# Altium PCB SMART_WATCH.PcbDoc (part 4 of 4)
Units mil, origin at the board's own origin, x right, y up, seen from the top; angles counter-clockwise.
Board outline 2401.57 x 2362.2 mil, 2 copper layers (Top Layer, Bottom Layer); 98 components, 64 nets, 344 pads, 272 vias.
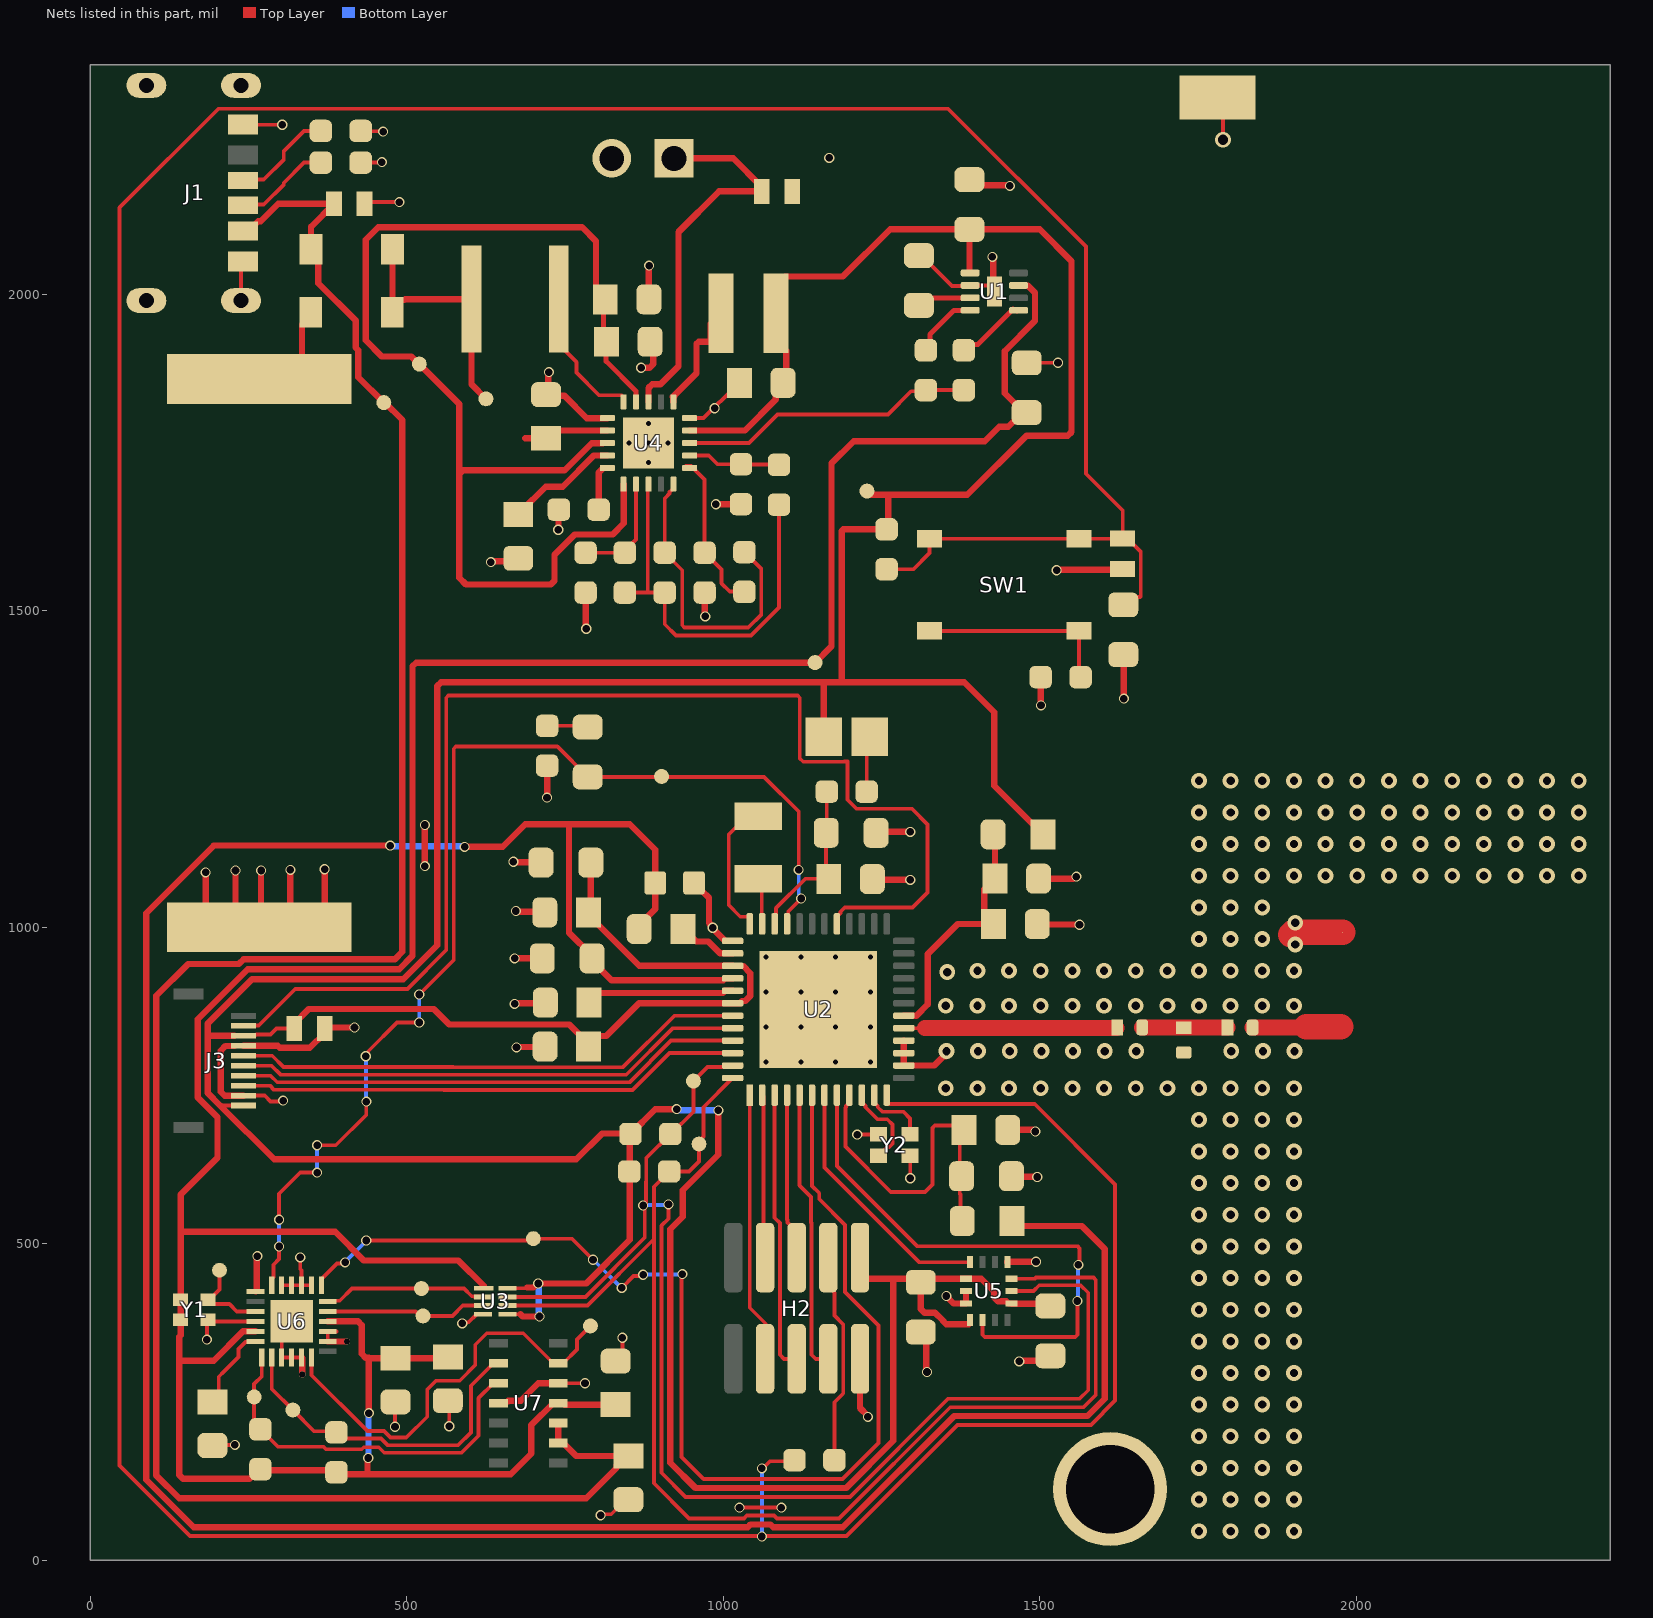
[diagram p2: the nets of this part, all layers, seen from the top]

## Part data (continued)
U6: "Ultra-Low Power Biometric Sensor Hub", Manufacturer_Name="Analog Devices Inc", Supplier Part Number 1=505-MAX32664GTGD+-ND, Copyright="Copyright (C) 2025 Ultra Librarian. All rights reserved.", Manufacturer_Part_Number=MAX32664GTGD+, RefDes=RefDes, Supplier 1=DigiKey, Type=Type
U7: "SENSOR - OXIMETER/HEART RATE I2C", Case Code (Imperial)=0603, Case Code (Metric)=1608, Dielectric=C0G, Dielectric Material=Ceramic, Manufacturer=KEMET, Manufacturer Part Number=C0603C159C5GACTU, Max Operating Temperature=125°C, Min Operating Temperature=-55°C, Package=None, Supplier Part Number=76Y2914, Supplier Part Number 1=MAX30102EFD+TCT-ND, Temperature Coefficient=30ppm/°C, Tolerance=5%, Voltage=50V, Case/Package=0603, Category="Ceramic Capacitors", Check_prices=https://www.snapeda.com/parts/MAX30102EFD+T/Maxim+Integrated/view-part/?ref=eda, China RoHS=Compliant, ComponentLink1Description=https://datasheet.octopart.com:443/C0603C159C5GACTU-KEMET-datasheet-178132257.pdf?src-supplier=IHS, ComponentLink1URL=https://datasheet.octopart.com:443/C0603C159C5GACTU-KEMET-datasheet-178132257.pdf?src-supplier=IHS, ComponentLink2Description=https://datasheet.octopart.com:443/C0603C159C5GAC7867-KEMET-datasheet-10540709.pdf?src-supplier=IHS, ComponentLink2URL=https://datasheet.octopart.com:443/C0603C159C5GAC7867-KEMET-datasheet-10540709.pdf?src-supplier=IHS, ComponentLink3Description=https://datasheet.octopart.com:443/C0603C159C5GACTU-KEMET-datasheet-137357764.pdf?src-supplier=Upverter, ComponentLink3URL=https://datasheet.octopart.com:443/C0603C159C5GACTU-KEMET-datasheet-137357764.pdf?src-supplier=Upverter, ComponentLink4Description=https://datasheet.octopart.com:443/C0603C159C5GACTU-KEMET-datasheet-68331921.pdf?src-supplier=TME, ComponentLink4URL=https://datasheet.octopart.com:443/C0603C159C5GACTU-KEMET-datasheet-68331921.pdf?src-supplier=TME, ComponentLink5Description=https://datasheet.octopart.com:443/C0603C159C5GACTU-KEMET-datasheet-137149553.pdf?src-supplier=TME, ComponentLink5URL=https://datasheet.octopart.com:443/C0603C159C5GACTU-KEMET-datasheet-137149553.pdf?src-supplier=TME, ComponentLink6Description=https://datasheet.octopart.com:443/C0603C159C5GACTU-KEMET-datasheet-149521895.pdf?src-supplier=Farnell, ComponentLink6URL=https://datasheet.octopart.com:443/C0603C159C5GACTU-KEMET-datasheet-149521895.pdf?src-supplier=Farnell, ComponentLink7Description=https://datasheet.octopart.com:443/C0603C159C5GACTU-KEMET-datasheet-100448650.pdf?src-supplier=Farnell, ComponentLink7URL=https://datasheet.octopart.com:443/C0603C159C5GACTU-KEMET-datasheet-100448650.pdf?src-supplier=Farnell, ComponentLink8Description=https://datasheet.octopart.com:443/C0603C159C5GACTU-KEMET-datasheet-176289432.pdf?src-supplier=element14+APAC, ComponentLink8URL=https://datasheet.octopart.com:443/C0603C159C5GACTU-KEMET-datasheet-176289432.pdf?src-supplier=element14+APAC, ComponentLink9Description=https://datasheet.octopart.com:443/C0603C159C5GACTU-Kemet-datasheet-66160328.pdf?src-supplier=element14+APAC, ComponentLink9URL=https://datasheet.octopart.com:443/C0603C159C5GACTU-Kemet-datasheet-66160328.pdf?src-supplier=element14+APAC, ComponentLink10Description=https://datasheet.octopart.com:443/C0603C159C5GACTU-Kemet-datasheet-62058882.pdf?src-supplier=element14+APAC, ComponentLink10URL=https://datasheet.octopart.com:443/C0603C159C5GACTU-Kemet-datasheet-62058882.pdf?src-supplier=element14+APAC, ComponentLink11Description=https://datasheet.octopart.com:443/C0603C159C5GACTU-KEMET-datasheet-81638365.pdf?src-supplier=element14+APAC, ComponentLink11URL=https://datasheet.octopart.com:443/C0603C159C5GACTU-KEMET-datasheet-81638365.pdf?src-supplier=element14+APAC, ComponentLink12Description=https://datasheet.octopart.com:443/C0603C159C5GACTU-KEMET-datasheet-157246123.pdf?src-supplier=Electro+Sonic, ComponentLink12URL=https://datasheet.octopart.com:443/C0603C159C5GACTU-KEMET-datasheet-157246123.pdf?src-supplier=Electro+Sonic, ComponentLink13Description=https://datasheet.octopart.com:443/C0603C159C5GACTU-KEMET-datasheet-41232428.pdf?src-supplier=Electro+Sonic, ComponentLink13URL=https://datasheet.octopart.com:443/C0603C159C5GACTU-KEMET-datasheet-41232428.pdf?src-supplier=Electro+Sonic, ComponentLink14Description=https://datasheet.octopart.com/C0603C159C5GACTU-KEMET-datasheet-84169754.pdf, ComponentLink14URL=https://datasheet.octopart.com/C0603C159C5GACTU-KEMET-datasheet-84169754.pdf, ComponentLink15Description=https://datasheet.octopart.com:443/C0603C159C5GACTU-Kemet-datasheet-11574563.pdf?src-supplier=Arrow+Electronics, ComponentLink15URL=https://datasheet.octopart.com:443/C0603C159C5GACTU-Kemet-datasheet-11574563.pdf?src-supplier=Arrow+Electronics, ComponentLink16Description=https://datasheet.octopart.com:443/C0603C159C5GACTU-Kemet-datasheet-5314449.pdf?src-supplier=Newark, ComponentLink16URL=https://datasheet.octopart.com:443/C0603C159C5GACTU-Kemet-datasheet-5314449.pdf?src-supplier=Newark, ComponentLink17Description=https://datasheet.octopart.com:443/C0603C159C5GACTU-Kemet-datasheet-10282724.pdf?src-supplier=Newark, ComponentLink17URL=https://datasheet.octopart.com:443/C0603C159C5GACTU-Kemet-datasheet-10282724.pdf?src-supplier=Newark, ComponentLink18Description=https://datasheet.octopart.com:443/C0603C159C5GAC7867-KEMET-datasheet-164857143.pdf?src-supplier=Burklin+Elektronik, ComponentLink18URL=https://datasheet.octopart.com:443/C0603C159C5GAC7867-KEMET-datasheet-164857143.pdf?src-supplier=Burklin+Elektronik, ComponentLink19Description=https://datasheet.octopart.com:443/C0603C159C5GAC-TU-Kemet-datasheet-8749474.pdf?src-supplier=Jameco, ComponentLink19URL=https://datasheet.octopart.com:443/C0603C159C5GAC-TU-Kemet-datasheet-8749474.pdf?src-supplier=Jameco, ComponentLink20Description=https://datasheet.octopart.com:443/C0603C159C5GACTU-Kemet-datasheet-464.pdf?src-supplier=RS+(Formerly+Allied+Electronics), ComponentLink20URL=https://datasheet.octopart.com:443/C0603C159C5GACTU-Kemet-datasheet-464.pdf?src-supplier=RS+(Formerly+Allied+Electronics), Depth=800µm, Digi-Key_Part_Number=MAX30102EFD+TTR-ND, Dissipation Factor=0.1%, Height=800µm, Lead Free="Lead Free", Lead Pitch=700µm, Length=1.6mm, Lifecycle Status=Production, Material=Ceramic, MF="Maxim Integrated Products", Mounting Technology="Surface Mount", MP=MAX30102EFD+T, Number of Terminals=2, Packaging="Cut Tape", Pins=2, Pricing="1=0.133, 10=0.048, 25=0.042, 50=0.035, 100=0.029, 250=0.026, 500=0.023 (USD)", Purchase-URL=https://pricing.snapeda.com/search/part/MAX30102EFD+T/?ref=eda, REACH SVHC=Yes, RoHS=Compliant, Schedule B="8532240020, 8532240020|8532240020|8532240020|8532240020|8532240020", SnapEDA_Link=https://www.snapeda.com/parts/MAX30102EFD+T/Maxim+Integrated/view-part/?ref=snap, Stock=56315, Supplier=Newark, Supplier 1=DigiKey, Termination=SMD/SMT, Thickness=863.6µm, Voltage Rating=50V, Voltage Rating (DC)=50V, Width=800µm
X2: "Crystal 0.032768MHz ±20ppm (Tol) 12.5pF Flexural 70000Ohm 2-Pin CSMD T/R", Case/Package=CSMD, ESR (Equivalent Series Resistance)=70kR, Frequency=32.768kHz, Frequency Tolerance=20ppm, Load Capacitance=12.5pF, Manufacturer=Abracon, Manufacturer Part Number=ABS07-32.768KHZ-H-T, Max Operating Temperature=85°C, Min Operating Temperature=-40°C, Operating Frequency="32.768 kHz", Operating Frequency-Nom=0.032768, Package Quantity=3000, Supplier Part Number=535-ABS07-32.768KHZ-H-TTR-ND, Supplier Part Number 1=535-ABS07-32.768KHZ-H-TCT-ND, Additional Feature="TAPE AND REEL", Aging="3 PPM/FIRST YEAR", Category=Crystals, ComponentLink1Description=https://datasheet.ciiva.com:443/pdfs/VipMasterIC/IC/ABRC/ABRC-S-A0006623177/ABRC-S-A0006623177-1.pdf?src-supplier=IHS+Markit, ComponentLink1URL=https://datasheet.ciiva.com:443/pdfs/VipMasterIC/IC/ABRC/ABRC-S-A0006623177/ABRC-S-A0006623177-1.pdf?src-supplier=IHS+Markit, ComponentLink2Description=https://datasheet.ciiva.com/854/abs07-854935.pdf?src-supplier=Digikey, ComponentLink2URL=https://datasheet.ciiva.com/854/abs07-854935.pdf?src-supplier=Digikey, ComponentLink3Description=https://datasheet.ciiva.com/854/abs07-854936.pdf?src-supplier=Digikey, ComponentLink3URL=https://datasheet.ciiva.com/854/abs07-854936.pdf?src-supplier=Digikey, ComponentLink4Description=https://datasheet.ciiva.com/854/abs07-854937.pdf?src-supplier=Digikey, ComponentLink4URL=https://datasheet.ciiva.com/854/abs07-854937.pdf?src-supplier=Digikey, ComponentLink5Description=https://datasheet.ciiva.com/15214/getdatasheetpartid-727011-15214954.pdf?src-supplier=Verical, ComponentLink5URL=https://datasheet.ciiva.com/15214/getdatasheetpartid-727011-15214954.pdf?src-supplier=Verical, ComponentLink6Description=https://datasheet.ciiva.com/7998/1912628-7998667.pdf?src-supplier=Element14, ComponentLink6URL=https://datasheet.ciiva.com/7998/1912628-7998667.pdf?src-supplier=Element14, ComponentLink7Description=https://datasheet.ciiva.com/1357/1883680-1357319.pdf?src-supplier=Element14, ComponentLink7URL=https://datasheet.ciiva.com/1357/1883680-1357319.pdf?src-supplier=Element14, ComponentLink8Description=https://datasheet.ciiva.com/4944/abs07-11028-4944830.pdf?src-supplier=Mouser, ComponentLink8URL=https://datasheet.ciiva.com/4944/abs07-11028-4944830.pdf?src-supplier=Mouser, Crystal/Resonator Type="PARALLEL - FUNDAMENTAL", Depth=1.5mm, Drive Level=0.5uW, ESR=70kR, Height=0.9mm, Lead Free="Lead Free", Length=3.2mm, Mounting Technology="Surface Mount", Packaging="Tape and Reel", Pins=2, Pricing="1=0.64, 10=0.502, 50=0.502, 100=0.463, 500=0.438, 1000=0.419, 3000=0.308, 6000=0.281, 9000=0.269, 10000=0.269, 24000=0.258 (USD)", Radiation Hardening=No, Reach SVHC Compliant=Yes, RoHS=Yes, RoHS Compliant=Yes, Series=ABS07, Stock=349794, Supplier=Mouser, Supplier 1=DigiKey, Termination=SMD/SMT, Tolerance=20ppm, Width=1.5mm
Y1: library part "32.768 kHz", "32.768 kHz XO (Standard) CMOS Oscillator Enable/Disable 4-SMD, No Lead", Package=None, Check_prices=https://www.snapeda.com/parts/ECS-327MV-DM-TR/ECS+Inc./view-part/?ref=eda, Digi-Key_Part_Number=50-ECS-327MV-DM-TR-ND, MF="ECS Inc.", MP=ECS-327MV-DM-TR, Purchase-URL=https://pricing.snapeda.com/search/part/ECS-327MV-DM-TR/?ref=eda, SnapEDA_Link=https://www.snapeda.com/parts/ECS-327MV-DM-TR/ECS+Inc./view-part/?ref=snap
Y2: "Fundamental Active RoHS Compliant MHz Crystal Crystal 10pF 0.022 0.55mm -20C~70C 80Ohm", Manufacturer=TXC, Manufacturer Part Number=8Y38472012, Supplier Part Number=887-8Y38472012CT-ND, Category=Crystals, Pricing="1=0.78, 10=0.674, 25=0.6372, 50=0.611, 100=0.5857, 250=0.55384, 500=0.53094, 1000=0.50897 (USD)", Stock=5079, Supplier=DigiKey, Supplier 1=DigiKey, Supplier Part Number 1=887-8Y38472012CT-ND

## Free pads (board coordinates)
  rect 120x70 smd paste+0 mask+0: 20(1780.79,2310.75)

## Via types
v1: diameter 25, hole 13, Top Layer to Bottom Layer, tented both sides, 162 vias
v2: diameter 16, hole 12, Top Layer to Bottom Layer, tented both sides, 91 vias
v3: diameter 19.68, hole 7.87, Top Layer to Bottom Layer, tented top, 16 vias
v4: diameter 10, hole 10, Top Layer to Bottom Layer, tented both sides, 2 vias
v5: diameter 25, hole 16, Top Layer to Bottom Layer, 1 vias

## Nets (pads, with @x,y where several pads share a name; then routed paths per layer and width w, separated by ;. In a path a pad name is that pad's centre, name@x,y a point inside that pad or via, vN(x,y) a via of type N, cw(c..) or ccw(c..) an arc to the next point about the centre after c; other vN are vias at no path point)
32KHz: 32kHz.1 U6.9 Y1.3 | length 137.8
  Top Layer w6: 32kHz.1@204,458 204,427.43 187.99,411.42 Y1.3@186.02,411.42 192.87,404.57 219.59,404.57 231.2,392.96 U6.9@260.96,392.96
+1V8_OUT: 1.8V.1 C10.1 C15.1 C16.1 C17.1 R12.2 R13.2 U1.7 U3.1 U6.11 U6.22 U7.11 Y1.1 Y1.4 | length 5009.9
  Top Layer w10: U6.11@260.96,361.46 241.25,361.46 194.74,314.96 140.57,314.96 ; U6.22@375.13,377.21 422.9,377.21 428.76,371.35 428.76,325.86 434.62,320 439.96,320 v2(439.96,232.28) ; v2(438.98,161.42) 437.83,160.27 437.83,138.44 435.04,135.65 ; 439.96,318.9 C15.1@482.28,318.9 562.92,318.9 C16.1@564.77,320.75 ; 621.39,433.41 581.38,473.43 432.09,473.43 386.81,518.7 142.72,518.7 ; C17.1@830,245.55 749.53,245.55 747.05,248.03 U7.11@739.17,248.03 731.3,248.03 696.71,213.44 696.71,168.36 664.01,135.65 435.04,135.65 ; U1.7@1466.45,2013.96 1466.76,2013.65 1481.35,2013.65 1492.41,2002.59 1492.41,1957.91 1444.71,1910.21 1444.71,1843.68 1472.77,1815.61 C10.1@1472.77,1812.99 ; C10.1@1479.33,1812.99 C10.1@1472.77,1812.99 ; 140.57,314.96 140.57,134.49 146.43,128.63 251.54,128.63 266.61,143.7 R13.2@268.7,143.7 270.18,142.22 385.33,142.22 391.91,135.65 435.04,135.65 ; 140.57,314.96 140.57,352.93 142.72,355.08 Y1.1@142.72,379.92 Y1.4@142.72,411.42 142.72,518.7 ; 142.72,518.7 142.72,577.63 200.79,635.7 200.79,699.7 169.56,730.92 169.56,854.45 248.67,933.56 487.93,933.56 508.86,954.49 508.86,1412.14 514.72,1418 1.8V.1@1145,1418 1171,1444 1171,1733.01 1205.87,1767.88 1413.31,1767.88 1435.97,1790.53 1450.31,1790.53 C10.1@1472.77,1812.99
  Bottom Layer w10: v2(438.98,161.42) 439.47,161.91 439.47,231.79 v2(439.96,232.28)
+3V3_OUT: 3.3V.1 C1.2 C7.1 C9.1 C13.1 C14.1 C20.1 C26.1 D6.2 FB2.1 FB3.1 H2.1 J3.1 J3.8 L1.2 R14.2 R15.2 R22.1 U1.1 U2.39 U2.42 U3.5 U3.8 U4.14 U5.5 U5.8 U5.12 | length 8565.6
  Top Layer w6: 205.48,718.13 J3.1@241.83,718.13 ; J3.8@241.83,828.37 243.36,829.9 261.34,829.9 262.03,830.59 284.73,830.59 294.14,840 D6.2@321.89,840 ; U3.5@659.19,388.33 679.58,388.33 ; U3.8@659.19,429.67 689.43,429.67 690.39,430.63
  Top Layer w10: J3.8@227.15,828.4 187.19,828.4 185.56,826.77 ; D6.2@321.89,840 321.89,847.38 345.19,870.69 542.64,870.69 567.08,846.25 756.46,846.25 787.3,815.42 C26.1@787.3,813.46 ; 679.58,388.33 683.07,384.84 v2(709.65,384.84) ; 690.39,430.63 699.68,430.63 v2@706.05,437.01 ; v2(707.68,437.01) 783.46,437.01 852.43,505.97 852.43,672.31 R15.2@853.35,673.23 892.72,712.6 v2(926.18,712.6) ; C26.1@787.3,811.48 C26.1@787.3,813.46 ; C20.1@790.8,1102.16 790.8,1027.35 C9.1@786.87,1023.42 786.87,1019.48 867.45,938.9 U2.39@1014.76,938.9 1014.88,938.78 1031.3,938.78 1042.69,927.39 1042.69,891.35 1034.75,883.41 1030.14,883.41 1026.57,879.84 U2.42@1014.76,879.84 866.84,879.84 815.15,828.15 801.98,828.15 C26.1@787.3,813.46 ; R15.2@851.5,674 808.72,674 767.91,633.19 290.43,633.19 205.48,718.13 185.56,738.05 185.56,826.77 ; U4.14@946.76,1784.63 1033.65,1784.63 1082.75,1833.74 1082.75,1848.3 C1.2@1094.45,1860 ; v2(992.13,710.63) 992.13,640.33 936.02,584.22 936.02,542.32 916.34,522.64 916.34,153.72 956.1,113.95 1194.22,113.95 1268.67,188.4 1268.67,444.7 ; C1.2@1099.37,1860 1099.37,1910.63 1083.31,1926.69 L1.2@1083.31,1970 1083.31,2013.31 1097.99,2027.99 1188.99,2027.99 1263.54,2102.54 C7.1@1388.89,2102.54 ; FB3.1@1158.56,1301 1158.56,1387 ; H2.1@1216,478 1216,454.03 1225.33,444.7 1268.67,444.7 ; 3.3V.1@1232.93,1683.07 1260.83,1683.07 ; C13.1@1312.01,444.7 1268.67,444.7 ; U5.8@1389.81,379.25 1389.81,374.82 1387.89,372.9 1383.46,372.9 1383.26,372.7 1352.49,372.7 1346.63,378.56 1346.63,378.71 1334.42,390.92 1317.87,390.92 1312.01,396.78 C13.1@1312.01,438.98 1317.73,444.7 U5.5@1383.41,444.7 1407.66,444.7 1428.17,424.19 1428.17,414.95 1434.03,409.09 1447.23,409.09 U5.12@1450.91,405.41 ; U1.1@1390.07,2033.65 1389.2,2033.65 1388.89,2033.96 C7.1@1388.89,2102.54 ; U5.12@1455.26,405.33 U5.12@1455.26,405.33 1513.06,405.25 C14.1@1516.73,401.57 ; FB2.1@1504.91,1146.65 1428.15,1223.41 1428.15,1339.57 1380.72,1387 1187,1387 ; 185.56,826.77 185.56,847.82 255.3,917.56 494.56,917.56 548.23,971.23 548.23,1381.14 554.09,1387 1158.56,1387 ; 1158.56,1387 1187,1387 ; 1187,1387 1187,1625.98 1189.51,1628.5 R22.1@1258,1628.5 1260.65,1631.14 1260.65,1655.35 1260.83,1655.17 1260.83,1683.07 ; 1260.83,1683.07 1385.54,1683.07 1479.05,1776.58 1544.34,1776.58 1550.2,1782.44 1550.2,2052.17 1499.82,2102.54 C7.1@1388.89,2102.54
  Bottom Layer w10: v2(707.68,437.01) 708.66,436.02 708.66,385.83 v2(709.65,384.84) ; v2(926.18,712.6) 927.8,712.6 929.77,710.63 v2(992.13,710.63)
+5V_USB: 5V.1 C19.1 D3.1 D4.2 J1.A9 U7.9 U7.10 | length 3531.1
  Top Layer w10: J1.A9@241.26,2100.16 249.92,2100.16 265.3,2115.54 269.44,2115.54 296.9,2143 D4.2@384.89,2143 348.7,2106.82 D3.1@348.7,2071 360.24,2059.46 360.24,2017.34 419.04,1958.54 419.04,1915.91 423.37,1911.58 423.37,1868.95 5V.1@462.6,1829.72 ; 5V.1@463.58,1828.74 464.57,1829.72 492.86,1801.43 492.86,961.11 481.3,949.56 242.04,949.56 234.41,941.93 154.8,941.93 104.33,891.46 104.33,133.67 140.31,97.69 783.24,97.69 831.38,145.83 831.38,149.76 C19.1@846.06,164.45 ; U7.10@739.17,216.54 U7.9@739.17,185.04 747.05,185.04 767.64,164.45 C19.1@846.06,164.45 ; C19.1@850,164.45 C19.1@846.06,164.45
+VDCDC: C21.1 C22.1 FB1.1 L5.2 U2.40 | length 4411.9
  Top Layer w10: v2(473.86,1128.94) 195.11,1128.94 88.33,1022.15 88.33,127.04 163.42,51.95 1038.43,51.95 1042.88,56.4 1074.37,56.4 1078.83,51.94 1188.78,51.94 1364.42,227.58 1574.91,227.58 1602.52,255.19 1602.52,491.5 1566.2,527.82 1464.1,527.82 FB1.1@1456.32,535.6 ; v2(591.23,1126.97) 651.57,1126.97 687.01,1162.4 755.91,1162.4 ; L5.2@867.13,997.05 867.13,1003.6 892.29,1028.77 892.29,1122.47 852.36,1162.4 755.91,1162.4 ; U2.40@1014.76,919.21 1002.95,919.21 999.95,916.21 823.31,916.21 792.71,946.82 792.71,954.69 756.18,991.22 756.18,1162.13 755.91,1162.4
  Bottom Layer w10: v2(473.86,1128.94) 474.84,1127.95 590.24,1127.95 v2(591.23,1126.97)
BMI_INT1: U2.7 U5.4 | length 406.4
  Top Layer w6: U2.7@1159.84,734.76 1159.84,620.16 1309.22,470.78 U5.4@1389.81,470.78
BMI_INT2: U2.8 U5.9 | length 863.7
  Top Layer w6: U2.8@1179.53,734.76 1179.53,622.64 1306.1,496.06 1559.42,496.06 1562.94,492.55 1562.94,468.45 v2(1561.02,466.54) ; U5.9@1409.5,379.25 1409.5,355.95 1413.01,352.43 1556,352.43 1559.52,355.95 v2(1559.52,409.45)
  Bottom Layer w6: v2(1559.52,409.45) 1560.27,410.2 1560.27,465.78 v2(1561.02,466.54)
DBG_SWCLK: H2.8 U2.1 | length 427.6
  Top Layer w6: U2.1@1041.73,734.76 1041.73,398.77 1067,373.5 1067,319 H2.8@1066,318
DBG_SWDIO: H2.7 U2.2 | length 258.7
  Top Layer w6: U2.2@1061.42,734.76 1063.54,732.65 1063.54,480.46 H2.7@1066,478
DBG_SWO: H2.6 U2.3 | length 442.9
  Top Layer w6: U2.3@1081.1,734.76 1081.1,540.88 1089.5,532.48 1089.5,324.51 1096.01,318 H2.6@1116,318
GND: ANT1.GND C1.1 C3.2 C4.2 C5.2 C6.2 C7.2 C8.2 C9.2 C10.2 C11.2 C12.2 C13.2 C14.2 C15.2 C16.2 C17.2 C18.2 C19.2 C20.2 C21.2 C22.2 C23.2 C24.2 C25.2 C26.2 C28.2 C29.2 C30.2 C31.2 D1.2 D4.1 D5.1 D6.1 H1.N H2.2 H3.1 J1.A12 J1.B12 J1.S1 J1.S2 J1.S3 J1.S4 J2.2 J3.2 J3.7 pad.20 R5.2 R6.2 R8.1 R10.1 R11.1 R16.2 R18.1 R20.1 U1.2 U1.9 U2.0 U2.14 U2.15 U2.16 U2.37 U3.4 U4.1 U4.15 U4.21 U4.22 U4.23 U4.24 U4.25 U4.26 U5.1 U5.6 U5.7 U6.2 U6.3 U6.4 U6.5 U6.7 U6.10 U6.15 U6.16 U6.17 U6.20 U6.21 U6.25 U7.4 U7.12 Y1.2 Y2.2 Y2.4 | length 4695.7
  Top Layer w6: v2(184.06,348.43) 184.06,377.95 Y1.2@186.02,379.92 188.73,377.21 U6.10@260.96,377.21 ; C18.2@192.91,181.1 193.9,182.09 v2(228.35,182.09) ; J1.S2@238.11,1989.92 238.11,2048.58 J1.A12@241.26,2051.73 ; J1.B12@241.26,2268.27 241.81,2267.72 v2(303.15,2267.72) ; J3.2@241.83,733.88 275.46,733.88 284.51,724.83 303.34,724.83 v2(304.51,726) ; U6.5@302.3,434.3 U6.4@318.05,434.3 U6.3@333.8,434.3 ; U6.25@318.05,377.21 302.3,361.46 U6.15@302.3,320.13 U6.16@318.05,320.13 U6.17@333.8,320.13 ; v2(331.69,478.35) 331.69,460.06 333.8,457.96 U6.3@333.8,434.3 ; U6.2@349.54,434.3 U6.3@333.8,434.3 ; U6.20@375.13,345.72 U6.21@375.13,361.46 375.26,361.34 389.01,361.34 389.13,361.21 ; R6.2@427.2,2208 427.53,2208.33 460.3,2208.33 v2(460.63,2208.66) ; R5.2@427.55,2258.35 428.46,2257.44 462.04,2257.44 v2(462.6,2256.89) ; D4.1@433.11,2143 435.78,2145.67 v2(488.19,2145.67) ; v2(481.3,210.63) 481.3,249.02 C15.2@482.28,250 ; C16.2@564.77,251.85 566.93,249.69 v2(566.93,211.61) ; v2(587.6,374.02) 589.51,375.93 597.57,375.93 609.98,388.33 U3.4@620.21,388.33 ; U7.12@739.17,279.53 v2(781.5,279.53) ; v2(806.1,70.95) 807.53,72.38 822.9,72.38 846.06,95.55 C19.2@850,95.55 ; C17.2@830,314.45 840.55,325 v2(840.55,351.38) ; U4.15@946.76,1804.32 968.88,1804.32 1020.63,1856.06 C1.1@1020.63,1860 ; v2(1025.59,82.95) 1025.81,83.17 1091.45,83.17 v2(1091.67,82.94) ; v2(1211.61,672.24) 1244.15,672.24 Y2.2@1244.9,673 ; C24.2@1240.37,1076.08 C24.2@1241.65,1074.8 ; C23.2@1241.37,1149.08 C23.2@1242.88,1150.59 ; Y2.4@1295.1,639 1295.28,638.82 v2(1295.28,603.35) ; C12.2@1309.17,2061.2 1313.1,2061.2 1361.33,2012.98 1389.09,2012.98 U1.2@1390.07,2013.96 1419.45,2013.96 1426.34,2007.06 1428.26,2005.15 U1.9@1428.26,2004.12 ; C10.2@1479.33,1891.73 1479.41,1891.81 v2(1528.86,1891.81) ; pad.20@1780.79,2310.75 1789.37,2302.17 v5(1789.37,2244.09)
  Top Layer w10: v2(182.09,1086.61) 182.09,1034.3 216.46,999.93 H1.N@266.7,999.93 ; J3.7@227.15,812.4 213.49,812.4 206,804.91 206,740.24 212.36,733.88 J3.2@241.83,733.88 ; v2(229.33,1089.57) 229.33,1034.3 263.7,999.93 H1.N@266.7,999.93 ; J3.7@241.87,812.59 295.9,812.59 299.18,809.31 346.81,809.31 370.11,832.62 D6.1@370.11,840 371.65,841.54 v2(417.32,841.54) ; U6.7@260.96,424.46 261.63,424.46 262.63,425.46 262.63,479.17 v2(263.78,480.32) ; H1.N@269.68,1002.91 v2(269.68,1089.57) ; H1.N@315.94,1019.3 v2(315.94,1090.55) ; U6.17@333.8,320.13 334.54,319.38 334.54,301.57 334.65,301.47 v4(334.65,293.31) ; v2(370.08,1091.54) 370.08,1034.3 335.71,999.93 H1.N@266.7,999.93 ; U6.20@375.13,345.72 375.38,345.47 v4(405.51,345.47) ; v2(528.54,1096.46) v2(528.54,1161.42) ; v2(632.87,1576.77) 634.02,1577.92 C11.2@676.08,1577.92 ; U7.4@644.69,248.03 646.57,249.92 658.31,249.92 660.31,251.92 680.26,251.92 707.87,279.53 U7.12@739.17,279.53 ; v2(668.31,1103.35) 668.9,1102.75 711.47,1102.75 C20.2@712.06,1102.16 ; v2(670.28,878.94) 671.24,879.91 717.92,879.91 C25.2@718.89,880.87 ; v2(670.28,950.79) C22.2@713.97,950.76 ; v2(672.24,1025.59) 673.33,1024.5 716.88,1024.5 C9.2@717.97,1023.42 ; v2(673.23,810.04) 673.95,810.76 717.68,810.76 C26.2@718.4,811.48 ; v2(721.46,1204.72) 721.61,1204.87 721.61,1255.06 R18.1@721.76,1255.21 ; v2(724.41,1876.97) 723.26,1875.82 723.26,1844.71 C8.2@720,1841.45 721.97,1839.48 749.11,1839.48 784.27,1804.32 U4.1@816.84,1804.32 ; v2(739.17,1627.95) 739.62,1628.4 739.62,1659.18 R20.1@740.07,1659.63 ; R8.1@782.39,1528.72 782.93,1528.19 782.93,1471.99 v2(783.46,1471.46) ; v2(870.08,1883.86) 883.51,1883.86 889.37,1889.72 C6.2@889.37,1925 ; U4.21@874.36,1798.45 U4.21@875.94,1798.45 ; C5.2@882.45,1992 882.45,2044.85 v2(882.87,2045.28) ; C21.2@953.71,1070 953.71,1068.82 965.83,1056.69 967.02,1056.69 977.36,1046.35 977.36,1006.54 983.85,1000.06 v2@983.85,998.54 ; R11.1@970.39,1528.72 970.92,1528.19 970.92,1491.68 v2(971.46,1491.14) ; v2(983.27,999.02) 983.27,997.95 1002.95,978.27 U2.37@1014.76,978.27 ; v2(988.19,1668.31) 988.29,1668.41 1027.9,1668.41 R10.1@1028,1668.5 ; H2.2@1216,318 1216,240.35 1228.35,228 v2(1228.35,226.38) ; C24.2@1241.65,1074.8 v2(1295.28,1074.8) ; C23.2@1242.88,1150.59 v2(1295.28,1150.59) ; U2.16@1285.24,820.79 U2.15@1285.24,801.1 U2.14@1285.24,781.42 1333.26,781.42 1347.52,795.67 v1@1351.57,795.67 ; C13.2@1312.01,360.24 1320.7,351.54 1320.7,298.39 v2(1321.85,297.24) ; v2(1352.36,417.32) 1364.35,405.33 U5.7@1383.41,405.33 U5.6@1383.41,425.02 ; C7.2@1388.89,2181.28 1397.77,2172.41 1451.61,2172.41 v2(1452.76,2171.26) ; v2(1425.2,2059.06) 1426.34,2057.91 1426.34,2007.06 1426.34,2006.03 U1.9@1428.26,2004.12 ; U5.1@1448.87,470.78 1448.87,471.38 1448.94,471.46 v2(1494.09,471.46) ; C29.2@1449.4,679.6 1449.66,679.86 1488.79,679.86 1491.49,677.17 v2(1493.11,677.17) ; C28.2@1455.32,606.6 1455.96,605.96 1495.42,605.96 v2(1496.06,605.32) ; v2(1467.52,313.98) 1468.67,315.12 1509.02,315.12 C14.2@1516.73,322.83 ; C31.2@1496.06,1004.92 1496.61,1004.37 1562.3,1004.37 v2(1562.84,1003.83) ; C30.2@1498.03,1076.77 1553.01,1076.78 1556.13,1079.9 v2(1557.75,1079.9) ; R16.2@1501.5,1395 1501.74,1394.77 1501.74,1350.63 v2(1501.97,1350.39) ; v2(1526.57,1563.98) 1527.53,1564.93 1630.05,1564.93 D5.1@1631,1565.89 ; C4.2@1632,1430.63 1632.44,1430.19 1632.44,1361.66 v2(1632.87,1361.22)
  Top Layer w40: 1896.65,988.19 1900.29,991.82 ANT1.GND@1978.67,991.82
  other v1: 1751.58,45.67 1801.58,45.67 1851.58,45.67 1901.58,45.67 1751.58,95.67 1801.58,95.67 1851.58,95.67 1901.58,95.67 1751.58,145.67 1801.58,145.67 1851.58,145.67 1901.58,145.67 1751.58,195.67 1801.58,195.67 1851.58,195.67 1901.58,195.67 1751.58,245.67 1801.58,245.67 1851.58,245.67 1901.58,245.67 1751.58,295.67 1801.58,295.67 1851.58,295.67 1901.58,295.67 1751.58,345.67 1801.58,345.67 1851.58,345.67 1901.58,345.67 1751.58,395.67 1801.58,395.67 1851.58,395.67 1901.58,395.67 1751.58,445.67 1801.58,445.67 1851.58,445.67 1901.58,445.67 1751.58,495.67 1801.58,495.67 1851.58,495.67 1901.58,495.67 1751.58,545.67 1801.58,545.67 1851.58,545.67 1901.58,545.67 1751.58,595.67 1801.58,595.67 1851.58,595.67 1901.58,595.67 1751.58,645.67 1801.58,645.67 1851.58,645.67 1901.58,645.67 1751.58,695.67 1801.58,695.67 1851.58,695.67 1901.58,695.67 1351.57,745.67 1401.57,745.67 1451.57,745.67 1501.58,745.67 1551.58,745.67 1601.58,745.67 1651.58,745.67 1701.58,745.67 1751.58,745.67 1801.58,745.67 1851.58,745.67 1901.58,745.67 1352.56,804.13 1402.56,804.13 1452.56,804.13 1502.56,804.13 1552.56,804.13 1602.56,804.13 1652.56,804.13 1802.56,804.13 1852.56,804.13 1902.56,804.13 1351.57,875.98 1401.57,875.98 1451.57,875.98 1501.57,875.98 1551.57,875.98 1601.57,875.98 1651.57,875.98 1701.57,875.98 1751.57,875.98 1801.57,875.98 1851.57,875.98 1901.57,875.98 1353.92,928.95 1401.57,931.3 1451.57,931.3 1501.58,931.3 1551.58,931.3 1601.58,931.3 1651.58,931.3 1701.58,931.3 1751.58,931.3 1801.58,931.3 1851.58,931.3 1901.58,931.3 1903.54,972.44 1751.58,981.3 1801.58,981.3 1851.58,981.3 1903.54,1006.89 1751.58,1031.3 1801.58,1031.3 1851.58,1031.3 1751.58,1081.3 1801.58,1081.3 1851.58,1081.3 1901.58,1081.3 1951.58,1081.3 2001.58,1081.3 2051.58,1081.3 2101.58,1081.3 2151.58,1081.3 2201.58,1081.3 2251.58,1081.3 2301.58,1081.3 2351.58,1081.3 1751.58,1131.3 1801.58,1131.3 1851.58,1131.3 1901.58,1131.3 1951.58,1131.3 2001.58,1131.3 2051.58,1131.3 2101.58,1131.3 2151.58,1131.3 2201.58,1131.3 2251.58,1131.3 2301.58,1131.3 2351.58,1131.3 1751.58,1181.3 1801.58,1181.3 1851.58,1181.3 1901.58,1181.3 1951.58,1181.3 2001.58,1181.3 2051.58,1181.3 2101.58,1181.3 2151.58,1181.3 2201.58,1181.3 2251.58,1181.3 2301.58,1181.3 2351.58,1181.3 1751.58,1231.3 1801.58,1231.3 1851.58,1231.3 1901.58,1231.3 1951.58,1231.3 2001.58,1231.3 2051.58,1231.3 2101.58,1231.3 2151.58,1231.3 2201.58,1231.3 2251.58,1231.3 2301.58,1231.3 2351.58,1231.3
  other v2: 986.22,1819.88 1167.32,2215.55
  other v3: 1067.32,787.32 1122.44,787.32 1177.56,787.32 1232.68,787.32 1067.32,842.44 1122.44,842.44 1177.56,842.44 1232.68,842.44 1067.32,897.56 1122.44,897.56 1177.56,897.56 1232.68,897.56 1067.32,952.68 1122.44,952.68 1177.56,952.68 1232.68,952.68
HFXTAL_N: U2.10 Y2.3 | length 137.3
  Top Layer w6: U2.10@1218.9,734.76 1218.9,722.95 1224.46,717.39 1224.46,715.61 1243.6,696.47 1259.16,696.47 1267.4,688.23 1267.4,657.77 1262.13,652.5 1258.92,652.5 1255.4,648.99 1255.4,647.5 1246.9,639 Y2.3@1244.9,639
HFXTAL_P: U2.11 Y2.1 | length 104.7
  Top Layer w6: U2.11@1238.58,734.76 1238.58,722.95 1244.15,717.39 1244.15,715.61 1251.28,708.47 1284.63,708.47 1295.1,698 Y2.1@1295.1,673
HOST_I2C_SCL: H_SCL.1 R15.1 U2.47 U3.7 U5.13 | length 2122.9
  Top Layer w6: U3.7@659.19,415.89 782.15,415.89 875.76,509.51 875.76,560.27 v2(873.34,560.27) ; v2@875.76,560.28 877.68,562.19 877.68,568.62 877.84,568.78 877.84,597.36 878.22,597.74 878.22,635.11 R15.1@916.34,673.23 917.55,673.23 952.81,708.48 H_SCL.1@952.81,756.94 975.17,779.3 1012.65,779.3 U2.47@1014.76,781.42 ; v2(913.39,562.01) 913.39,539.48 902.34,528.44 902.34,138.02 940.4,99.95 1200.02,99.95 1354.99,254.92 1562.99,254.92 1576.52,268.45 1576.52,422.31 1564.52,434.31 1499.2,434.31 1489.9,425.02 U5.13@1455.26,425.02
  Bottom Layer w6: v2(873.34,560.27) 874.21,561.14 912.52,561.14 v2(913.39,562.01)
HOST_I2C_SDA: H_SDA.1 R14.1 U2.48 U3.6 U5.14 | length 2108
  Top Layer w6: U3.6@659.19,402.11 659.41,402.33 685.38,402.33 685.6,402.11 785.34,402.11 887.76,504.54 887.76,504.65 890.34,507.23 ; U2.48@1014.76,761.73 968.5,715.47 968.5,669.14 961.61,662.25 961.61,629.61 946,614 R14.1@914.5,614 890.34,589.84 890.34,507.23 ; U5.14@1455.26,444.7 1492.62,444.7 1494.23,446.31 1585,446.31 1588.52,442.8 1588.52,260.99 1569.11,241.58 1358.62,241.58 1182.98,65.94 1084.63,65.94 1080.17,70.4 1037.08,70.4 1032.63,65.95 945.86,65.95 890.34,121.47 890.34,504.54 890.34,507.23
HR_INT: HR_INT.1 U6.18 U7.13 | length 674.9
  Top Layer w6: U6.18@349.54,320.13 349.54,292.19 437.8,203.93 463.96,203.93 474.26,193.63 499.17,193.63 532.15,226.61 532.15,269.49 546.12,283.46 583.53,283.46 608.13,308.07 608.13,340.34 626.19,358.41 683.91,358.41 731.3,311.02 U7.13@739.17,311.02 747.05,311.02 768.78,332.76 768.78,348.78 HR_INT.1@790,370
LCD_CS: J3.4 U2.45 | length 804.6
  Top Layer w6: J3.4@241.83,765.38 284.85,765.38 295.22,755 563.43,755 563.57,754.86 851.65,754.86 917.58,820.79 U2.45@1014.76,820.79
LCD_RST: J3.6 U2.43 | length 814.1
  Top Layer w6: J3.6@241.83,796.87 287.3,796.87 305.16,779 573.37,779 573.51,778.86 841.71,778.86 923.01,860.16 U2.43@1014.76,860.16
LCD_SCK: J3.3 U2.46 | length 799.9
  Top Layer w6: J3.3@241.83,749.63 283.63,749.63 290.25,743 558.46,743 558.6,742.86 856.62,742.86 914.86,801.1 U2.46@1014.76,801.1
LCD_SDI: J3.5 U2.44 | length 809.3
  Top Layer w6: J3.5@241.83,781.13 286.07,781.13 300.19,767 568.4,767 568.54,766.86 846.68,766.86 920.29,840.47 U2.44@1014.76,840.47
LCD_VCOM: J3.9 U2.29 | length 1986.2
  Top Layer w6: J3.9@241.83,844.12 242.53,844.82 266.08,844.82 323.82,902.56 500.98,902.56 562.23,963.8 562.23,1362.63 565.74,1366.14 1117.4,1366.14 1120.92,1362.63 1120.92,1266.64 1126.19,1261.37 1190.92,1261.37 1191.29,1261.74 1196.26,1261.74 1196.26,1201.34 1210.59,1187.01 1298.1,1187.01 1322.75,1162.36 1322.75,1055.03 1298.88,1031.17 1191.87,1031.17 1185.09,1024.39 1185.09,1022.68 1185.09,1022.61 1179.53,1017.05 U2.29@1179.53,1005.24
LFXTAL_N: U2.36 X2.1 | length 220.6
  Top Layer w6: U2.36@1041.73,1005.24 1041.73,1014.49 1039.61,1016.61 1026.9,1016.61 1008.6,1034.91 1008.6,1146.22 1018.94,1156.56 1036.35,1156.56 X2.1@1055,1175.21
LFXTAL_P: U2.35 X2.2 | length 74.2
  Top Layer w6: X2.2@1055,1076.79 1060.73,1071.06 1060.73,1005.92 U2.35@1061.42,1005.24
MAX_MFIO: MFIO.1 U2.6 U6.1 | length 1880.4
  Top Layer w6: U6.1@365.29,434.3 365.29,444.3 389.55,468.56 400.65,468.56 v2(402.56,470.47) ; v2(435.91,504.92) 696.85,504.92 MFIO.1@699.8,507.87 760.83,507.87 v2(794.14,474.56) ; v2(839.57,430.12) 858.32,448.87 871.43,448.87 v2(873.34,450.79) ; v2(935.34,451.77) 934.06,450.49 934.06,162.87 968.97,127.95 1188.42,127.95 1245.35,184.88 1245.35,370.67 1192.5,423.52 1192.5,529.48 1151.5,570.48 1151.5,579.8 1140.16,591.14 U2.6@1140.16,734.76
  Bottom Layer w6: v2(402.56,470.47) 402.56,471.02 435.91,504.37 v2(435.91,504.92) ; v2(794.14,474.56) 794.64,474.56 839.07,430.12 v2(839.57,430.12) ; v2(873.34,450.79) 873.83,451.28 934.85,451.28 v2(935.34,451.77)
MAX_RST: C2.1 M_RST.1 U2.33 U6.6 | length 1799.1
  Top Layer w6: U6.6@286.55,434.3 286.55,444.3 289.3,447.05 289.3,466.8 298.23,475.73 v2(298.23,495.49) ; v2(298.23,537.7) 298.23,578.74 331.69,612.2 v2(358.27,612.2) ; v2(358.27,655.51) 387.8,655.51 436.02,703.74 v2(436.02,724.41) ; v2(435.04,796) 435.04,798.71 438.96,802.64 438.96,804.12 484.25,849.41 v2(519.69,849.41) ; v2(519.69,893.7) 574.23,948.24 574.23,1281.92 577.74,1285.43 737.8,1285.43 C2.1@785.73,1237.5 901.87,1237.5 M_RST.1@902.56,1238.19 903.25,1237.5 1064.5,1237.5 1119.09,1182.9 v2(1119.09,1090.55) ; U2.33@1100.79,1005.24 1102.53,1006.98 1102.53,1024.77 v2(1123.03,1045.28)
  Bottom Layer w6: v2(298.23,495.49) v2(298.23,537.7) ; v2(358.27,612.2) v2(358.27,655.51) ; v2(435.04,796) 435.53,795.51 435.53,724.9 v2(436.02,724.41) ; v2(519.69,849.41) v2(519.69,893.7) ; v2(1119.09,1090.55) 1119.09,1051.92 1123.03,1047.98 v2(1123.03,1045.28)
MAX_SCL: M_SCL.1 U3.2 U6.24 | length 258.9
  Top Layer w6: U6.24@375.13,408.71 376.13,409.71 394.04,409.71 413.33,429 M_SCL.1@523,429 590.44,429 602.51,416.93 605.72,416.93 606.02,416.63 619.47,416.63 U3.2@620.21,415.89
MAX_SDA: M_SDA.1 U3.3 U6.23 | length 254.8
  Top Layer w6: U6.23@375.13,392.96 513.69,392.96 520.82,385.83 572.06,385.83 588.34,402.11 U3.3@620.21,402.11
NetANT1_FEED: ANT1.FEED L4.2 | length 140
  Top Layer w25.2: L4.2@1836.13,841.72 1920.09,841.72 1921.19,842.82
  Top Layer w40: 1921.19,842.82 ANT1.FEED@1975.67,842.82
NetC2_2: C2.2 R18.2 | length 64.8
  Top Layer w6: R18.2@721.76,1318.2 783.76,1318.2 C2.2@785.73,1316.24
NetC3_1: C3.1 L3.2 L4.1 | length 138.6
  Top Layer w6: C3.1@1727.13,841.72 C3.1@1727.44,841.41
  Top Layer w25.2: L3.2@1661.81,841.72 C3.1@1727.13,841.72 ; C3.1@1723.92,841.72 L4.1@1796.76,841.72
NetC11_1: C11.1 U4.4 | length 177.4
  Top Layer w10: C11.1@676.09,1656.68 680.03,1656.68 719.33,1695.97 746.16,1695.97 795.45,1745.26 U4.4@816.84,1745.26
NetC12_1: C12.1 U1.3 | length 85.8
  Top Layer w8: C12.1@1309.17,1982.46 1320.61,1993.91 1389.7,1993.91 U1.3@1390.07,1994.28
NetC18_1: C18.1 U6.12 | length 132.8
  Top Layer w6: C18.1@192.91,250 202.88,259.97 202.88,289.76 210.94,297.83 211.11,297.83 233.96,320.68 233.96,333.7 244.98,344.72 259.96,344.72 U6.12@260.96,345.72
NetC23_1: C23.1 C24.1 R21.2 U2.34 | length 262
  Top Layer w6: U2.34@1081.1,1005.24 1083.22,1007.35 1083.22,1030.07 1129.73,1076.58 1162.13,1076.58 1162.13,1148.58 1163.5,1149.95 R21.2@1163.5,1214.08
NetC25_1: C25.1 U2.41 | length 234.9
  Top Layer w10: C25.1@787.79,880.87 787.79,881.28 802.47,895.96 999.39,895.96 1002.83,899.41 1014.65,899.41 U2.41@1014.76,899.53
NetC28_1: C28.1 C29.1 FB1.2 U2.9 | length 555
  Top Layer w6: U2.9@1199.21,734.76 1199.21,722.95 1193.65,717.39 1193.65,715.61 1192.91,714.87 1192.91,653.26 1264.48,581.69 1318.9,581.69 1330.6,593.39 1330.6,682.97 1334.11,686.49 1373.61,686.49 1376.07,684.03 C29.1@1380.5,679.6 1373.63,679.6 1373.63,609.55 C28.1@1376.58,606.6 1373.63,603.65 1373.63,578.49 1374.63,577.49 1374.63,538.55 FB1.2@1377.58,535.6
NetC30_1: C30.1 C31.1 FB2.2 U2.18 | length 404.6
  Top Layer w10: U2.18@1285.24,860.16 1285.35,860.28 1305.16,860.28 1322.83,877.95 1322.83,957.68 1370.08,1004.92 C31.1@1427.17,1004.92 1412.45,1019.64 1412.45,1060.09 C30.1@1429.13,1076.77 1429.13,1143.68 FB2.2@1426.17,1146.65
NetD2_1: D2.1 H1.P | length 197.3
  Top Layer w10: H1.P@260.83,1869.06 303.07,1869.06 334.45,1900.44 334.45,1951.98 348.23,1965.76 D2.1@348.23,1971.87 ; D2.1@340.31,1963.95 D2.1@348.23,1971.87 ; D2.1@340.31,1963.95 D2.1@348.23,1971.87 ; D2.1@340.31,1963.95 D2.1@348.23,1971.87
NetFB3_2: FB3.2 R21.1 | length 89
  Top Layer w6: R21.1@1226.5,1214.08 1226.5,1296.05 FB3.2@1231.44,1301
NetH2_3: H2.3 R17.2 | length 335.5
  Top Layer w6: H2.3@1166,478 1166,435.2 1174.88,426.32 1174.88,423.1 1175.5,422.49 1175.5,386.48 1189.5,372.48 1189.5,263.52 1175.5,249.52 R17.2@1175.5,158
NetJ1_A5: J1.A5 R5.1 | length 163.1
  Top Layer w6: J1.A5@241.26,2179.68 242.72,2181.15 273.88,2181.15 305.69,2212.95 305.69,2226.2 337.49,2258 R5.1@364.2,2258
NetJ1_B5: J1.B5 R6.1 | length 152.5
  Top Layer w6: J1.B5@241.26,2140.32 242.72,2141.78 273.88,2141.78 305.69,2173.58 305.69,2176.2 337.49,2208 R6.1@364.2,2208
NetL1_1: L1.1 U4.16 | length 185.9
  Top Layer w10: U4.16@921.17,1829.91 U4.16@921.17,1837.88 ; L1.1@996.69,1970 980.01,1953.31 980.01,1925.14 961.19,1925.14 957.68,1921.63 957.68,1875.27 922.9,1840.49 922.9,1838.72 922.06,1837.88 U4.16@921.17,1837.88 ; U4.16@921.17,1837.88 920.29,1837.88 921.17,1838.76 U4.16@921.17,1837.88
NetL2_2: L2.2 U4.20 | length 232.9
  Top Layer w6: L2.2@734.2,1926.4 767.91,1892.7 767.91,1876.28 803.76,1840.43 838.99,1840.43 842.43,1836.99 U4.20@842.43,1827.87 ; L2.2@740.07,1923.41 L2.2@740.07,1992.31
NetL3_1: L3.1 U2.17 | length 337.7
  Top Layer w6: U2.17@1285.24,840.47 1318.98,840.47 ; L3.1@1621.19,840.47 L3.1@1622.44,841.72
  Top Layer w25.2: 1318.98,840.47 L3.1@1621.19,840.47
NetL5_1: L5.1 U2.38 | length 94.7
  Top Layer w10: L5.1@936.02,997.05 941.01,992.06 942.45,992.06 957.13,977.38 976.07,977.38 994.75,958.7 1014.65,958.7 U2.38@1014.76,958.58
NetR1_1: R1.1 R9.2 U4.10 | length 485.3
  Top Layer w6: U4.10@921.17,1699.98 921.17,1692.9 919.45,1691.17 918.73,1691.17 915.21,1687.66 915.21,1685.19 907.39,1677.37 R1.1@907.39,1591.72 935.13,1563.98 935.13,1476.94 938.65,1473.43 1039.37,1473.43 1060.09,1494.15 1060.09,1565.98 R9.2@1033.38,1592.7
NetR1_2: R1.2 R2.2 R7.2 U4.8 | length 653.7
  Top Layer w6: R7.2@844.4,1528.72 880.68,1528.72 ; U4.8@881.8,1699.98 880.68,1698.86 880.68,1528.72 ; R2.2@1088,1667.5 1088,1505.08 1043.55,1460.63 925.38,1460.63 907.39,1478.62 R1.2@907.39,1528.72 880.68,1528.72
NetR2_1: R2.1 R10.2 U4.12 | length 147.4
  Top Layer w6: U4.12@946.76,1745.26 976.91,1745.26 990.67,1731.5 R10.2@1028,1731.5 1028.5,1731 1087.5,1731 R2.1@1088,1730.5
NetR3_2: R3.2 U1.5 | length 108
  Top Layer w8: R3.2@1380,1911.5 1389.08,1920.58 1402.13,1920.58 1426.08,1944.52 U1.5@1457.83,1976.27 ; U1.5@1463.69,1973.28 1465.01,1974.59 U1.5@1466.45,1974.59
NetR4_2: R4.2 U1.4 | length 107
  Top Layer w8: R4.2@1320,1911.5 1326.36,1917.85 1326.36,1936.36 1364.59,1974.59 U1.4@1390.07,1974.59
NetR7_1: R7.1 R8.2 U4.7 | length 177.6
  Top Layer w6: R8.2@782.39,1591.72 R7.1@844.4,1591.72 844.4,1594.89 862.12,1612.6 U4.7@862.12,1699.98
NetR9_1: R9.1 R11.2 U4.11 | length 255.3
  Top Layer w6: U4.11@940.9,1728.57 949.12,1728.57 970.39,1707.3 R11.2@970.39,1591.72 997.1,1565 997.1,1543.25 1010.18,1530.18 1032.91,1530.18 R9.1@1033.38,1529.71
NetR16_1: R16.1 SW1.3 SW1.4 | length 310.4
  Top Layer w6: SW1.3@1325.89,1468.17 SW1.4@1562.11,1468.17 1562.11,1397.39 R16.1@1564.5,1395
NetR20_2: R20.2 U4.5 | length 75.5
  Top Layer w10: R20.2@803.06,1659.63 803.06,1718.33 810.31,1725.57 U4.5@816.84,1725.57
RESET: C4.1 D5.2 R17.1 R22.2 SW1.1 SW1.2 U2.12 | length 7341.6
  Top Layer w6: v2(1061.02,144.95) 1062.44,144.95 1073.75,156.26 1110.77,156.26 R17.1@1112.5,158 ; R22.2@1258,1565.5 1300.34,1565.5 1325.89,1591.05 SW1.1@1325.89,1613.83 SW1.2@1562.11,1613.83 1616.35,1613.83 1616.63,1614.11 1623.62,1614.11 D5.2@1631,1614.11 ; U2.12@1258.27,734.76 1258.27,722.95 1260.39,720.83 1263.54,720.83 1263.9,720.47 1492.13,720.47 1619.09,593.5 1619.09,251.97 1580.71,213.58 1370.22,213.58 1194.58,37.94 1061.56,37.94 v2(1061.02,37.4) 1060.47,37.95 157.62,37.95 46.26,149.31 46.26,2136.81 202.46,2293.02 1355.04,2293.02 1572.83,2075.22 1572.83,1716.54 1631,1658.37 D5.2@1631,1614.11 ; C4.1@1632,1509.37 1644.46,1521.83 1658.46,1521.83 1659.69,1523.06 1659.69,1592.81 1638.38,1614.11 D5.2@1631,1614.11
  Bottom Layer w6: v2(1061.02,37.4) v2(1061.02,144.95)
S_SCL: R12.1 S_SCL.1 U6.14 U7.2 | length 541.4
  Top Layer w6: U6.14@286.55,320.13 286.55,270.59 S_SCL.1@319.98,237.16 353.4,203.74 386.81,203.74 398.62,191.93 458.99,191.93 469.29,181.63 581.24,181.63 601.19,201.58 601.19,275.4 636.81,311.02 U7.2@644.69,311.02
S_SDA: R13.1 S_SDA.1 U6.13 U7.3 | length 596.9
  Top Layer w6: U6.13@270.8,320.13 270.8,290.28 258.77,278.25 258.77,257.87 258.77,216.62 296.26,179.13 368.45,179.13 372.52,175.06 428.57,175.06 431.93,178.42 455.53,178.42 464.32,169.63 586.21,169.63 613.19,196.61 613.19,255.91 636.81,279.53 U7.3@644.69,279.53
US0_RX: H2.4 U2.5 | length 447.3
  Top Layer w6: U2.5@1120.47,734.76 1120.47,592.13 1138.78,573.82 1138.78,533.2 1139.5,532.48 1139.5,324.51 1146.01,318 H2.4@1166,318
US0_TX: H2.5 U2.4 | length 263.1
  Top Layer w6: U2.4@1100.79,734.76 1100.79,538.16 1101.5,537.45 1101.5,533.51 1116,519.01 H2.5@1116,478
VBAT: D1.1 J2.1 U4.18 | length 617.9
  Top Layer w10: U4.18@881.8,1829.91 881.8,1851.85 887.66,1857.71 900.75,1857.71 929.13,1886.09 929.13,2098.38 993.34,2162.58 D1.1@1060.44,2162.58 1060.44,2169.96 1015.66,2214.75 J2.1@922.16,2214.75
VBAT_OK: R3.1 R4.1 U4.13 | length 467.8
  Top Layer w6: U4.13@946.76,1764.95 1040.54,1764.95 1085.59,1810 1260,1810 1296.8,1846.8 1318.29,1846.8 R4.1@1320,1848.5 R3.1@1380,1848.5
VIN_DC: C8.1 D2.2 D3.2 L2.1 U4.2 VIN.1 | length 538.2
  Top Layer w10: D3.2@477.44,2071 477.44,1972.34 D2.2@476.97,1971.87 476.97,1977.97 489.88,1990.88 495.98,1990.88 497.41,1992.31 L2.1@602.28,1992.31 602.28,1857.46 VIN.1@624.91,1834.83 ; 687.19,1772.55 C8.1@720,1772.55 732.08,1784.63 U4.2@816.84,1784.63
VSTOR: C5.1 C6.1 U4.3 U4.6 U4.19 VSTOR.1 | length 1918.8
  Top Layer w8: C6.1@810.63,1925 814.94,1920.69 814.94,1894.06 862.12,1846.88 U4.19@862.12,1829.91 ; C6.1@810.63,1930.6 810.63,1989.08 C5.1@813.55,1992
  Top Layer w10: U4.3@810.03,1764.67 792.23,1764.67 749.24,1721.68 588.76,1721.68 582.9,1715.82 ; C5.1@813.55,1992 798.87,2006.69 798.87,2084.01 776.86,2106.02 454.97,2106.02 435.04,2086.08 435.04,1927.17 460.63,1901.57 507.02,1901.57 518.83,1889.76 VSTOR.1@519.69,1889.76 582.9,1826.55 582.9,1715.82 ; U4.6@842.7,1699.71 842.7,1637.98 825.16,1620.43 765.31,1620.43 733.27,1588.39 733.27,1547.2 727.41,1541.34 593.5,1541.34 582.9,1551.94 582.9,1715.82
pads on no net: H2.9 H2.10 J1.B9 J3.10 J3.S1 J3.S2 U1.6 U1.8 U2.13 U2.19 U2.20 U2.21 U2.22 U2.23 U2.24 U2.25 U2.26 U2.27 U2.28 U2.30 U2.31 U2.32 U4.9 U4.17 U5.2 U5.3 U5.10 U5.11 U6.8 U6.19 U7.1 U7.5 U7.6 U7.7 U7.8 U7.14

## Polygon pours and split planes (outlines as drawn)
GND on Top Layer "GND_L01_P027" (solid, pour order 27): 941.93,1818.9 1005.87,1883.62 1057.32,1883.62 1063.98,1876.97 1063.98,1799.59 936.23,1799.59
NetL2_2 on Top Layer "NETL2_2_L01_P026" (solid, pour order 26): 683.07,2092.52 689.96,2085.63 772.64,2085.63 772.64,1914.96 847.16,1840.44 842.43,1835.72 842.43,1818.09 827.57,1818.09 744.09,1901.57 682.09,1901.57 682.09,2088.58 683.07,2089.57
NetL1_1 on Top Layer "NETL1_1_L01_P024" (solid, pour order 24): 948.72,2048.23 1037.4,2048.23 1037.4,1891.73 990.16,1891.73 924.62,1826.2 924.62,1818.09 906.21,1818.09
VIN_DC on Top Layer "VIN_DC_L01_P023" (solid, pour order 23): 560.04,2089.57 563.98,2093.5 662.4,2093.5 662.4,1811.78 825.57,1789.19 718.5,1733.27 663.88,1737.7 663.1,1766.04 573.82,1855.31 573.82,1913.39 562.99,1924.21 459.06,1924.21 459.06,2094.54 459.53,2095.02 460.06,2094.49 649.61,2094.49
GND on Top Layer "GND_L01_P018" (solid, pour order 18): 1322.83,813.98 1323.82,814.96 1913.39,814.96 1913.39,6.89 1914.37,5.91 1727.36,5.91 1727.36,723.43 1728.35,724.41 1724.41,728.35 1323.82,728.35 1323.82,814.96
GND on Top Layer "GND_L01_P022" (solid, pour order 22): 1893.7,814.79 1913.56,814.79 1916.69,814.79 1916.69,10.2 1882.87,10.2
GND on Top Layer "GND_L01_P021" (solid, pour order 21): 1916.34,1058.07 1916.34,871.26 1911.22,866.14 1895.67,866.14 1895.67,1058.07
GND on Top Layer "GND_L01_P017" (solid, pour order 17): 1334.65,954.72 1909.45,954.72 1912.4,951.77 1912.4,864.17 1334.65,864.17 1330.71,868.11 1330.71,950.79
GND on Top Layer "GND_L01_P019" (solid, pour order 19): 1909.45,954.72 1729.33,954.72 1729.33,1254.92 1730.32,1253.94 2401.57,1253.94 2401.57,1051.18 1909.45,1051.18 1909.45,954.72 1908.46,955.71 1729.33,955.71
GND on Top Layer "GND_L01_P013" (solid, remove dead copper, pour order 13): 755.61,2122.8 737.61,2140.8 734.31,2140.8 734.31,2250.8 733.31,2251.8 852.34,2251.8 849.68,2248.33 847.36,2250.56 851.77,2248.33 850.32,2249.78 847.37,2250.65 1008.31,2253.8 1010.31,2251.8 1010.31,2220.8 965.31,2220.8 953.31,2232.8 953.31,2245.8 890.31,2245.8 889.31,2246.8 888.31,2245.8 888.31,2180.8 956.31,2180.8 957.31,2179.8 957.31,2203.8 1010.31,2203.8 1012.31,2201.8 1010.31,2199.8 1010.31,2167.8 988.31,2167.8 946.31,2125.8 946.31,2122.8
GND on Top Layer "GND_L01_P012" (solid, remove dead copper, pour order 12): 1200.98,2070.52 1200.98,2252.52 1027.98,2252.52 1028.98,2251.52 1028.98,2214.52 1052.98,2190.52 1076.98,2190.52 1076.98,2136.52 1072.98,2132.52 1068.6,2136.9 1047.98,2136.9 1047.98,2115.52 1054.98,2108.52 1092.98,2108.52 1092.98,2062.52 1096.98,2058.52 1098.98,2060.52 1191.98,2060.52 1191.98,2061.52 1195.98,2065.52
GND on Bottom Layer "GND_L02_P016" (solid, pour order 16): 0,2362.2 2401.57,2362.2 2401.57,1053.15 2402.56,1052.17 1916.34,1052.17 1916.34,0 0,0

## Keep-outs
Keep-Out Layer:
  the board outline again, w10

## Other copper
Top Layer:
  rectangle net GND: 1729.33,951.77 1912.4,959.7

## Silkscreen, mask and mechanical layers (free items; w line width, h text height)
Top Overlay:
  drawing of 367 lines, arcs and shapes, not listed
  text "ECEN 5833" at 1964.7,2280 h47.24
  text "LDO" at 1455.91,2195.91 h27.56
  text "LOW POWER" at 1956.7,2163 h47.24
  text "RANGERS" at 1959.7,2092 h47.24
  text "INDUJA N" at 1965.7,1956 h47.24
  text "KARTHIK R" at 1970.7,1869 h47.24
  text "POWER" at 584.62,1464.16 h27.56
  text "RESET" at 1312.01,1344.49 h27.56
  text "MCU" at 895.67,850.39 h27.56
  text "LCD" at 47.24,808.07 h27.56
  text "HEART RATE" at 150.35,554.64 h27.56
  text "DEBUG" at 980.91,215.91 h27.56
  text "STEP" at 1377.95,182.09 h27.56